# Altium PCB V_6.PcbDoc
Units mm, origin at the board's own origin, x right, y up, seen from the top; angles counter-clockwise.
Board outline 70 x 20 mm, 3 copper layers (Top Layer, GND, Bottom Layer), stack 0.488 mm thick; 4 components, 5 nets, 70 pads, 32 vias.
Unrouted connection lines stored in the file: 2.
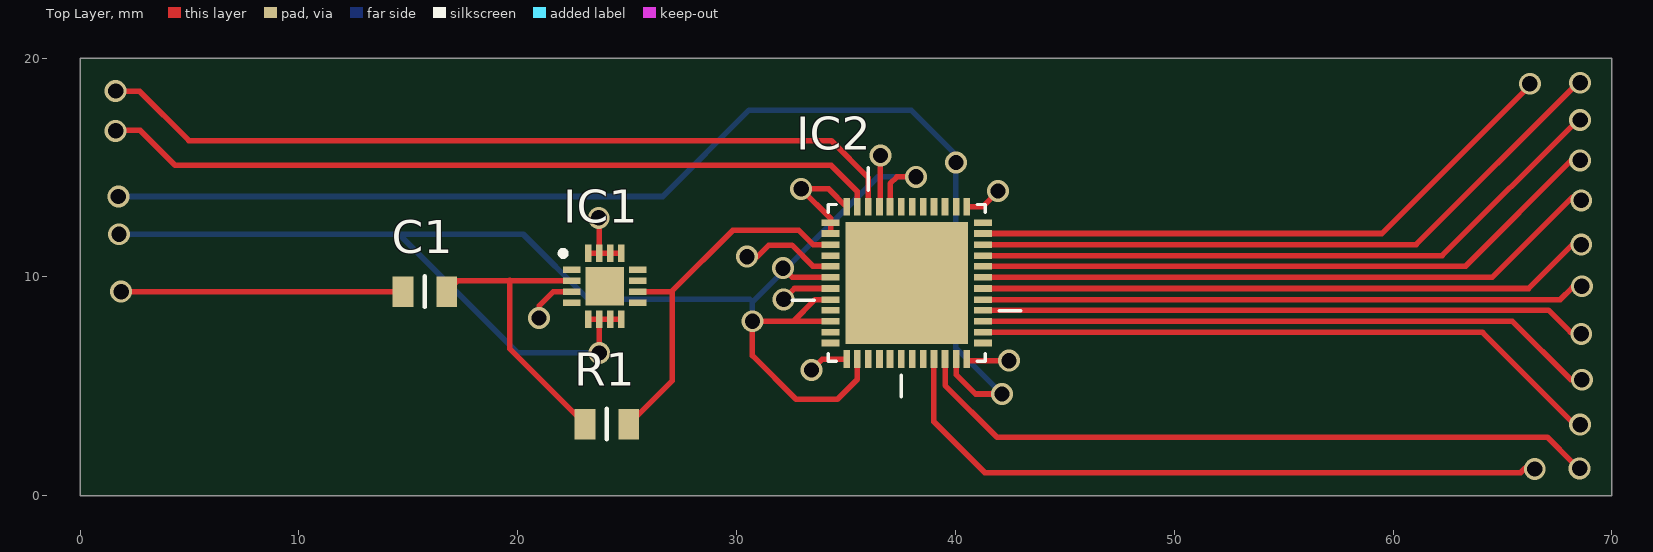
[diagram p0: Top Layer view]
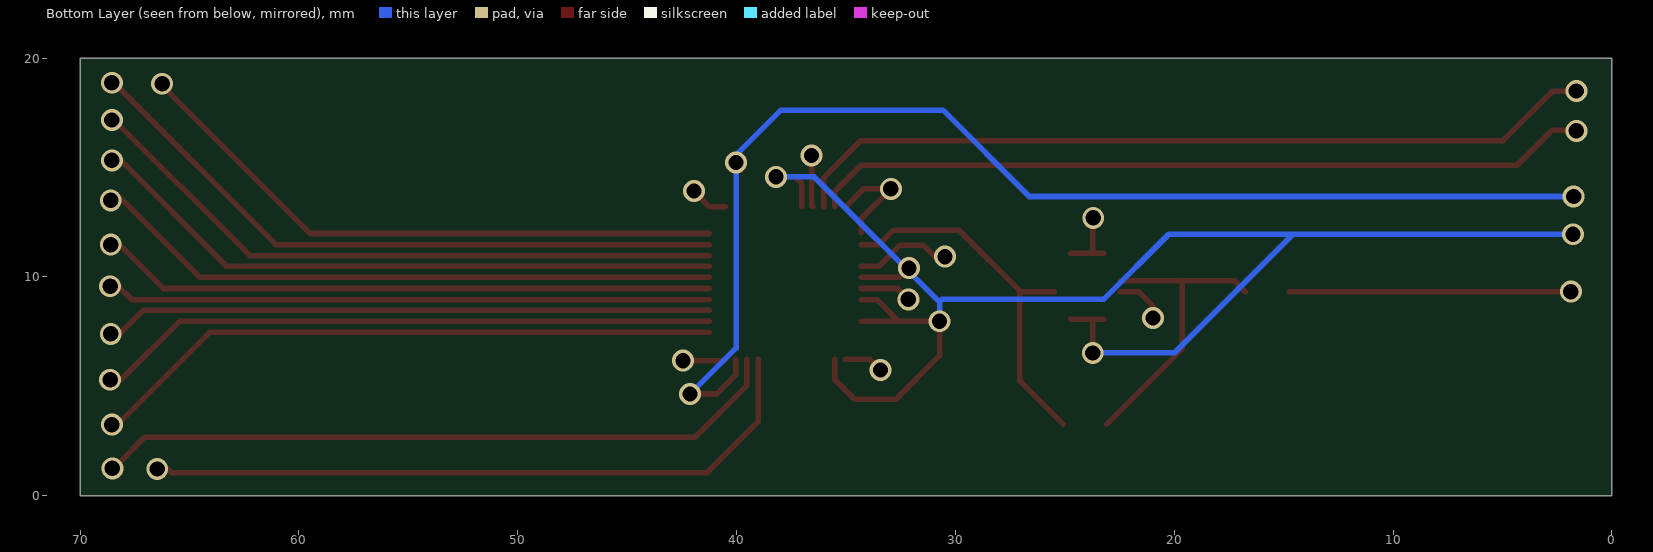
[diagram p1: Bottom Layer view, seen from below]
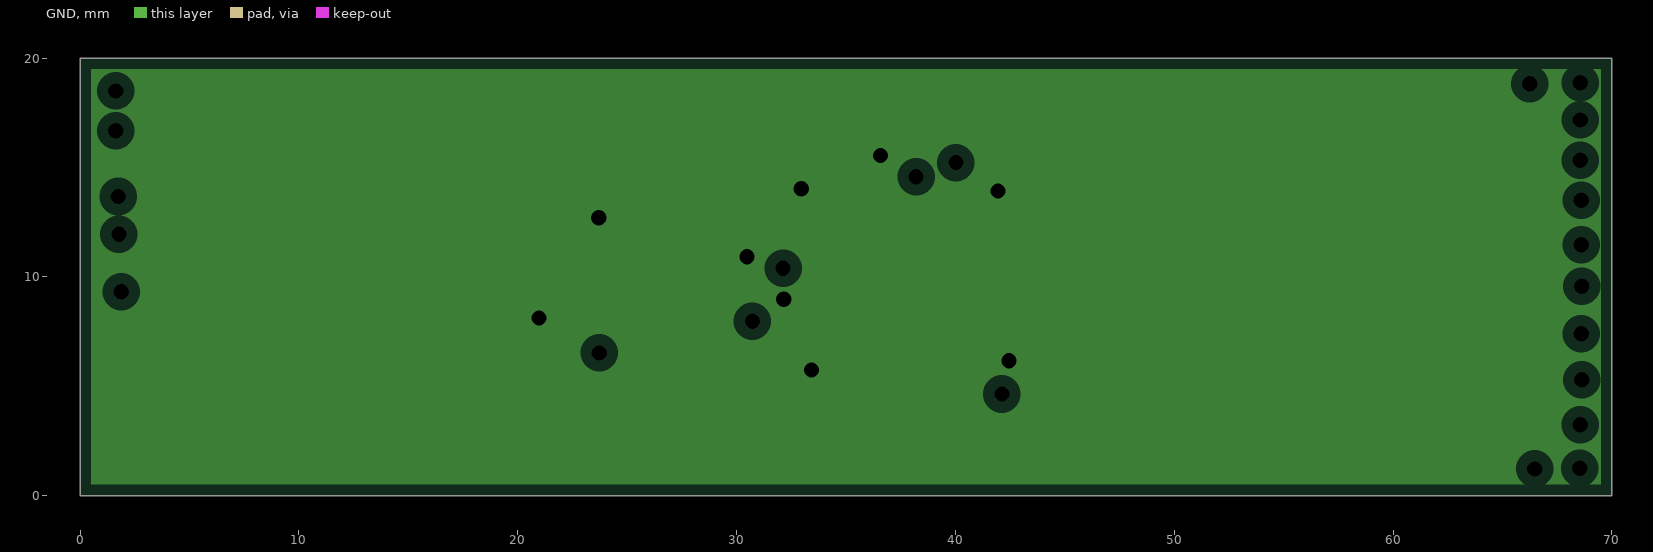
[diagram p2: GND, clearances drawn from the general rule]
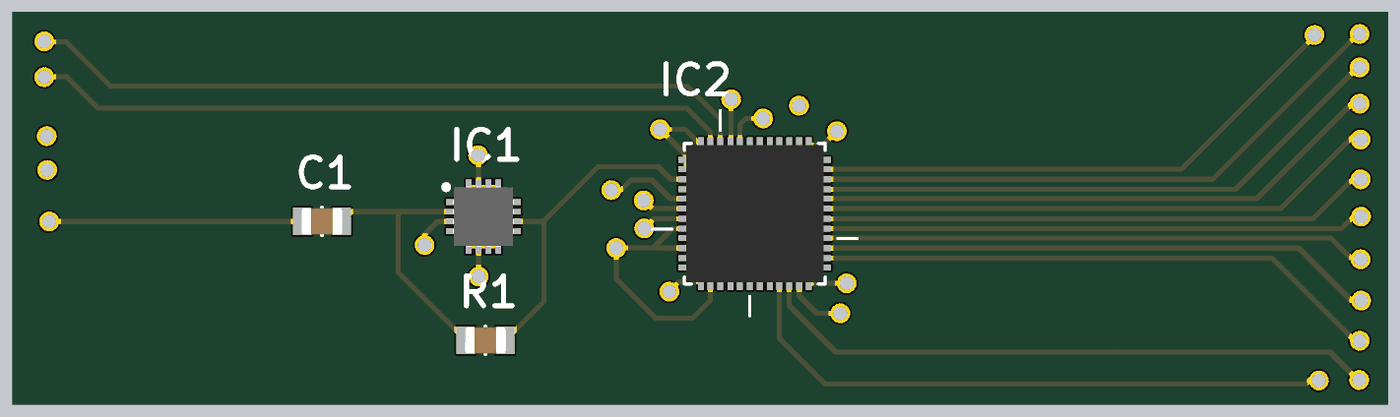
[diagram p3: 3D render of the assembled board from above, using the file's embedded part models]

## Layer stack, top to bottom
Top Solder: solder mask 0.0102, Solder Resist, Dk 3.5
Top Layer: signal copper 0.0356
Dielectric1: core 0.254, FR-4, Dk 4.2
GND: plane copper 0.036, net GND
Dielectric 2: prepreg 0.127, Dk 4.2
Bottom Layer: signal copper 0.0356
Bottom Solder: solder mask 0.0102, Solder Resist, Dk 3.5

## Board outline
0,0 70,0 70,20 0,20

## Design rules (kind name [scope] priority, off if disabled: settings)
Clearance [All] p1: gap=0.254 ignorepadtopadclearanceinfootprint=FALSE except(0: Arc-Hole Track-Hole SMDPad-Hole THPad-Hole Via-Hole Fill-Hole Poly-Hole Region-Hole Text-Hole)
PlaneClearance [All] p1: clearance=0.508
PlaneConnect [All] p1: planeconnectstyle=Relief reliefexpansion=0.508 reliefentries=4 reliefconductorwidth=0.254 reliefairgap=0.254
PolygonConnect [All] p1: connectstyle=Relief reliefconductorwidth=0.254 reliefentries=4 polygonreliefangle="90 Angle" airgapwidth=0.254
RoutingVias [All] p1: holewidth=0.711 width=1.27 viastyle="Through Hole" minholewidth=0.711 minwidth=1.27 maxholewidth=0.711 maxwidth=1.27
SilkToSolderMaskClearance SilkscreenOverComponentPads [IsPad] p1: minsilkscreentomaskgap=0.254 clearancetoexposedcopper=TRUE
SolderMaskExpansion [All] p1: expansion=0.102
Width [All] p1: maxlimit=0.254 minlimit=0.254 preferedwidth=0.254
27 further rules are at their usual default settings.

## Components (designator, comment, footprint, x,y, rotation, side; value= is the part's Value field where it differs from the comment)
C1 "Copasitor" Copasitor 15.179,8.726 r0 top
IC1 "ADA4932-1_4932-2" ADA4932-1 23.975,9.575 r0 top
IC2 "ADS61b49" ADS61b49 37.775,9.725 r270 top
R1 "Resistor" Resistor 23.5,2.675 r0 top

## Footprints (in the part's own frame and the unit in brackets; to place one, negate y for a bottom-side part, rotate by r counter-clockwise, add the part's x,y. Pads: shape width x height; smd on the part's side, far side on the other; paste and mask are expansions set on the pad)
ADA4932-1 [mm]
  rect 0.8x0.3 smd: 1(-1.5,0.75) 2(-1.5,0.25) 3(-1.5,-0.25) 4(-1.5,-0.75) 9(1.5,-0.75) 10(1.5,-0.25) 11(1.5,0.25) 12(1.5,0.75)
  rect 0.3x0.8 smd: 5(-0.75,-1.5) 6(-0.25,-1.5) 7(0.25,-1.5) 8(0.75,-1.5) 13(0.75,1.5) 14(0.25,1.5) 15(-0.25,1.5) 16(-0.75,1.5)
  rect 1.75x1.75 smd: 17(0,0)
  silkscreen extent -2.02,1.38 -1.77,1.62, body extent -1.55,-1.55 1.55,1.55, height 0.8
ADS61b49 [mil]
  rect 32x12 smd: 1(-137,108) 2(-137,89) 3(-137,69) 4(-137,49) 5(-137,30) 6(-137,10) 7(-137,-10) 8(-137,-30) 9(-137,-49) 10(-137,-69) 11(-137,-89) 12(-137,-108) 25(137,-108) 26(137,-89) 27(137,-69) 28(137,-49) 29(137,-30) 30(137,-10) 31(137,10) 32(137,30) 33(137,49) 34(137,69) 35(137,89) 36(137,108)
  rect 12x32 smd: 13(-108,-137) 14(-89,-137) 15(-69,-137) 16(-49,-137) 17(-30,-137) 18(-10,-137) 19(10,-137) 20(30,-137) 21(49,-137) 22(69,-137) 23(89,-137) 24(108,-137) 37(108,137) 38(89,137) 39(69,137) 40(49,137) 41(30,137) 42(10,137) 43(-10,137) 44(-30,137) 45(-49,137) 46(-69,137) 47(-89,137) 48(-108,137)
  rect 220x220 smd: 49(0,0)
  silkscreen extent -207,-206 205,205, body extent -138,-138 138,138, height 39
Copasitor [mm] "0805"
  rect 0.95x1.4 smd: 1(-0.425,0.6) 2(1.575,0.6)
  silkscreen extent 0.58,-0.1 0.58,1.3, body extent -0.47,-0.07 1.63,1.28, height 0.9
Resistor [mm] "0805"
  rect 0.95x1.4 smd: 1(-0.425,0.6) 2(1.575,0.6)
  silkscreen extent 0.58,-0.1 0.58,1.3, body extent -0.47,-0.07 1.63,1.28, height 0.9

## Via types
v1: diameter 1, hole 0.7, Top Layer to Bottom Layer, 32 vias

## Nets (pads, with @x,y where several pads share a name; then routed paths per layer and width w, separated by ;. In a path a pad name is that pad's centre, name@x,y a point inside that pad or via, vN(x,y) a via of type N, cw(c..) or ccw(c..) an arc to the next point about the centre after c; other vN are vias at no path point)
+1.8: IC2.2 IC2.35 | length 55.7
  Top Layer w0.254: IC2.35 40.036,5.539 40.925,4.65 v1(42.125,4.65)
  Bottom Layer w0.254: v1(1.75,13.675) 26.625,13.675 30.575,17.625 37.975,17.625 40.025,15.575 v1(40.025,15.225) 40.025,6.75 v1(42.125,4.65)
+3.3: IC1.5 IC1.6 IC1.7 IC1.8 IC2.8 IC2.18 IC2.20 IC2.22 IC2.24 IC2.26 | length 74.1
  Top Layer w0.254: IC1.5 IC1.6 ; v1(23.725,6.525) IC1.6 ; IC1.8 IC1.7 IC1.6 ; v1(32.125,10.4) 32.546,9.979 IC2.18 ; IC2.22 33.103,7.972 33.1,7.975 32.6,7.975 ; IC2.20 33.588,8.963 32.6,7.975 ; IC2.26 35.514,5.314 34.6,4.4 32.725,4.4 30.725,6.4 v1(30.725,7.975) 32.6,7.975 ; IC2.8@37.025,13.217 IC2.8 37.013,14.263 37.325,14.575 v1(38.2,14.575)
  Bottom Layer w0.254: v1(1.775,11.95) 14.575,11.95 ; v1(23.725,6.525) 20,6.525 14.575,11.95 ; 30.6,8.975 23.225,8.975 20.25,11.95 14.575,11.95 ; v1(30.725,7.975) 30.725,8.85 36.45,14.575 v1(38.2,14.575)
GND: IC1.3 IC1.13 IC1.14 IC1.15 IC1.16 IC2.1 IC2.9 IC2.12 IC2.13 IC2.14 IC2.17 IC2.19 IC2.25 IC2.36 | length 25.1
  Top Layer w0.254: v1(20.975,8.125) 20.975,8.675 21.617,9.317 21.625,9.317 ; 21.625,9.325 IC1.3 ; IC1.16 IC1.15 ; v1(23.7,12.7) 23.725,12.675 IC1.15 ; IC1.13 IC1.14 IC1.15 ; v1(30.475,10.925) 30.95,10.925 31.475,11.45 32.525,11.45 33.488,10.487 IC2.17 ; v1(32.15,8.975) 32.646,9.471 IC2.19 ; v1(33.425,5.75) 33.92,6.245 IC2.25 ; IC2.14@34.295,12.011 IC2.13 34.295,12.68 v1(32.95,14.025) 34.212,14.025 IC2.12 ; IC2.9 36.575,13.249 v1(36.575,15.55) ; IC2.36 40.588,6.175 v1(42.45,6.175) ; IC2.1 41.23,13.205 v1(41.95,13.925)
NetC1_2: C1.2 IC1.2 R1.1 | length 13.9
  Top Layer w0.254: C1.2 17.253,9.825 19.625,9.825 ; 19.625,9.85 19.625,9.825 ; IC1.2 19.625,9.825 ; R1.1 19.625,6.725 19.625,9.825
NetIC1_10: IC1.10 IC2.15 R1.2 | length 17.1
  Top Layer w0.254: R1.2 27.05,5.25 27.05,9.3 27.025,9.325 ; IC1.10 27.025,9.325 ; IC2.15 33.497,11.478 32.85,12.125 29.825,12.125 27.025,9.325
pads on no net: C1.1 IC1.1 IC1.4 IC1.9 IC1.11 IC1.12 IC1.17 IC2.3 IC2.4 IC2.5 IC2.6 IC2.7 IC2.10 IC2.11 IC2.16 IC2.21 IC2.23 IC2.27 IC2.28 IC2.29 IC2.30 IC2.31 IC2.32 IC2.33 IC2.34 IC2.37 IC2.38 IC2.39 IC2.40 IC2.41 IC2.42 IC2.43 IC2.44 IC2.45 IC2.46 IC2.47 IC2.48 IC2.49
copper on no net: | length 432.5
  Top Layer w0.254: v1@1.8,18.475 2.725,18.475 4.975,16.225 34.325,16.225 36.022,14.528 36.022,13.205 ; v1@1.825,16.7 2.75,16.7 4.35,15.1 34.325,15.1 35.514,13.911 35.514,13.205 ; v1(1.876,9.326) 14.754,9.326 ; 39.02,6.245 39.02,3.38 41.35,1.05 65.825,1.05 v1@66.275,1.5 ; 39.528,6.245 39.528,5.047 41.9,2.675 67.05,2.675 v1@68.2,1.525 ; 41.255,7.464 64.086,7.464 v1@68.2,3.35 ; 41.255,7.972 65.453,7.972 v1@68.125,5.3 ; 41.255,8.48 67.095,8.48 68.1,7.475 ; 41.255,8.963 67.638,8.963 v1@68.2,9.525 ; 41.255,9.471 66.196,9.471 v1@68.2,11.475 ; 41.255,9.979 64.529,9.979 v1@68.2,13.65 ; 41.255,10.487 63.312,10.487 v1@68.275,15.45 ; 41.255,10.97 62.245,10.97 v1@68.5,17.225 ; 41.255,11.478 61.053,11.478 v1@68.425,18.85 ; 41.255,11.986 59.486,11.986 v1@66.275,18.775
  other v1: 66.475,1.225 68.525,1.25 68.55,3.25 68.625,5.3 68.6,7.4 68.625,9.575 68.6,11.475 68.6,13.5 68.55,15.325 1.625,16.675 68.55,17.175 1.625,18.5 66.25,18.825 68.55,18.875

## Polygon pours and split planes (outlines as drawn)
GND on GND (split plane): 69.49,19.49 69.49,0.51 0.51,0.51 0.51,19.49